# Altium PCB CurrentTrans-board-multi.PcbDoc
Units mm, origin at the board's own origin, x right, y up, seen from the top; angles counter-clockwise.
Board outline 131.62 x 199.02 mm, 2 copper layers (Top Layer, Bottom Layer); 11 components, 11 nets, 65 pads, 5 vias.
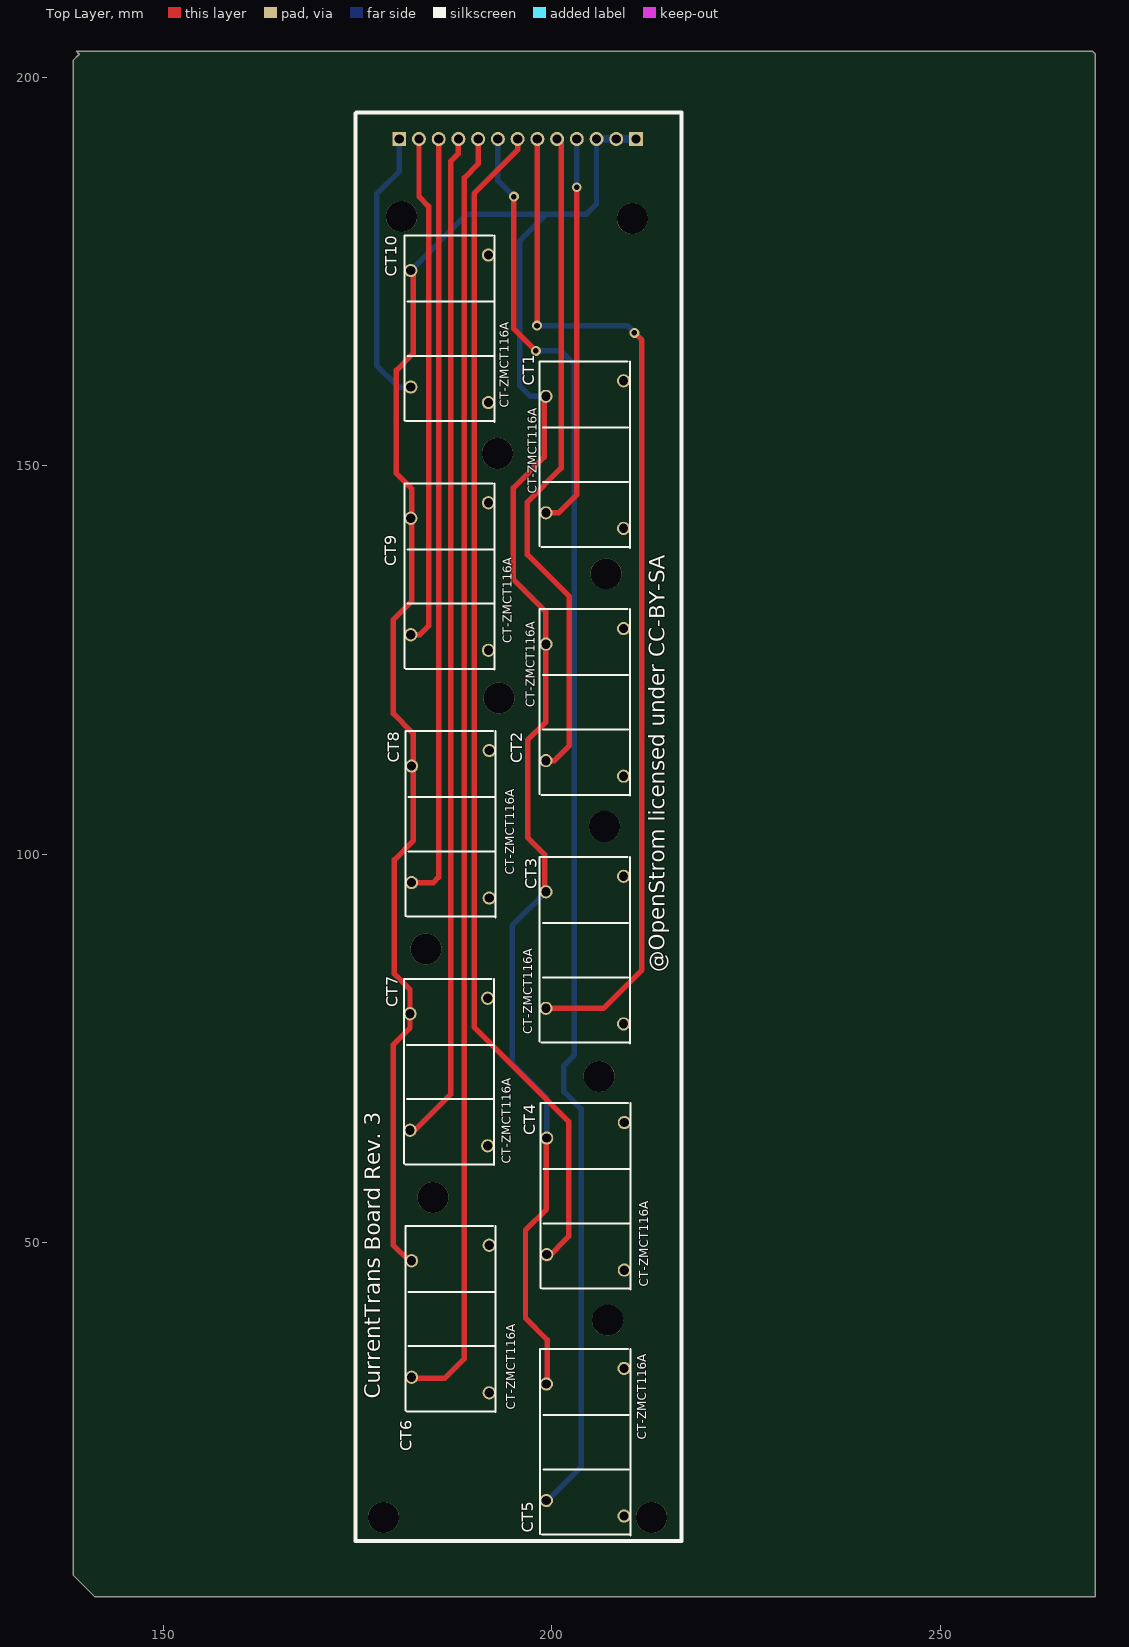
[diagram p0: Top Layer view]
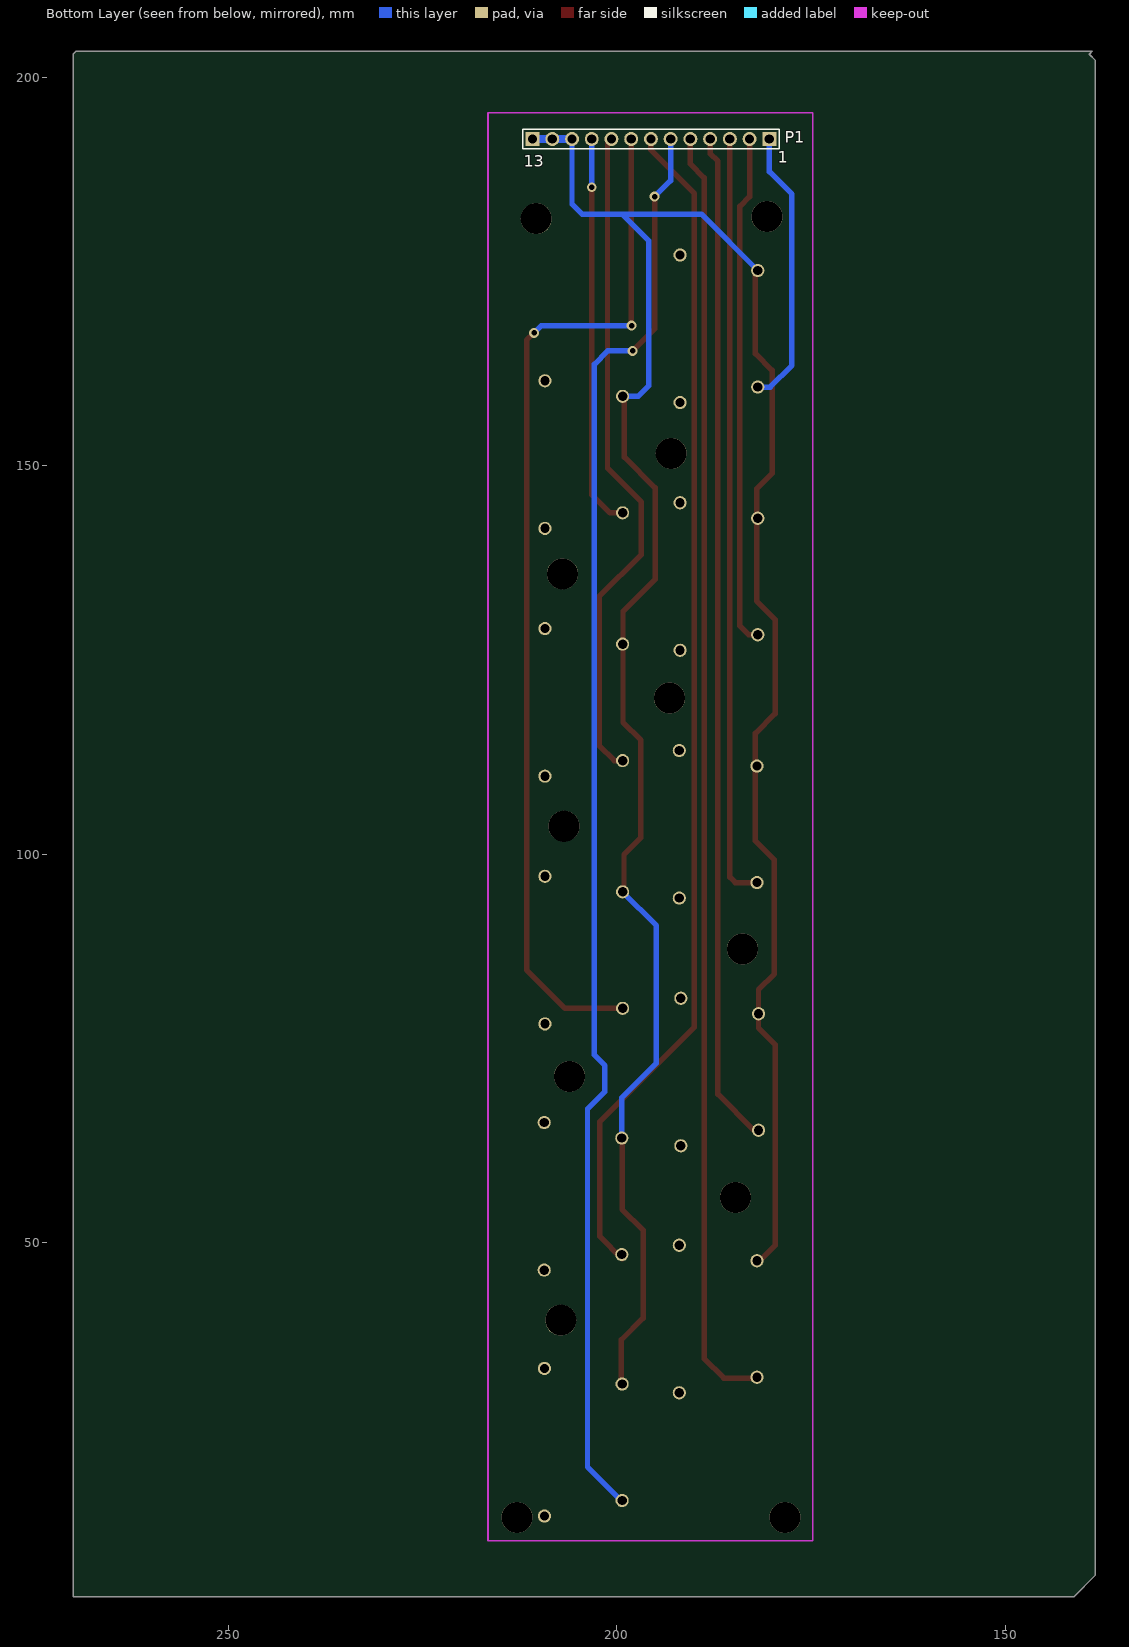
[diagram p1: Bottom Layer view, seen from below]

## Layer stack, top to bottom
Top Layer: signal copper 0.0356
Dielectric: dielectric 0.32, FR-4, Dk 4.8
Bottom Layer: signal copper 0.0356

## Board outline
138.775,203.4 269.6,203.4 270,203 270,4.375 141.175,4.375 138.375,7.175 138.375,202.2 139.175,203

## Design rules (kind name [scope] priority, off if disabled: settings)
Clearance [All] p1: gap=0.254
PolygonConnect [All] p1: connectstyle=Relief reliefconductorwidth=0.254 reliefentries=4 polygonreliefangle="90 Angle" airgapwidth=0.254
RoutingVias [All] p1: holewidth=0.711 width=5 viastyle="Through Hole" minholewidth=0.711 minwidth=1.27 maxholewidth=5 maxwidth=1.27
SilkToSilkClearance [All] p1 off: silktosilkclearance=0.254
SilkToSolderMaskClearance [IsPad] p1 off: minsilkscreentomaskgap=0.254 clearancetoexposedcopper=TRUE
SolderMaskExpansion [All] p1: expansion=0.102
Width [All] p1: maxlimit=2 minlimit=0.254 preferedwidth=0.7
26 further rules are at their usual default settings.

## Components (designator, comment, footprint, x,y, rotation, side; value= is the part's Value field where it differs from the comment)
CT1 "CurrentTransf" CT-ZMCT124 199.25,143.95 r90 top
CT2 "CurrentTransf" CT-ZMCT124 199.25,112.05 r90 top
CT3 "CurrentTransf" CT-ZMCT124 199.25,80.15 r90 top
CT4 "CurrentTransf" CT-ZMCT124 199.35,48.45 r90 top
CT5 "CurrentTransf" CT-ZMCT124 199.312,16.782 r90 top
CT6 "CurrentTransf" CT-ZMCT124 181.95,32.65 r90 top
CT7 "CurrentTransf" CT-ZMCT124 181.75,64.45 r90 top
CT8 "CurrentTransf" CT-ZMCT124 181.95,96.35 r90 top
CT9 "CurrentTransf" CT-ZMCT124 181.85,128.25 r90 top
CT10 "CurrentTransf" CT-ZMCT124 181.85,160.15 r90 top
P1 "Header 13" HDR1X13 210.845,192.086 r180 bottom

## Footprints (in the part's own frame and the unit in brackets; to place one, negate y for a bottom-side part, rotate by r counter-clockwise, add the part's x,y. Pads: shape width x height; smd on the part's side, far side on the other; paste and mask are expansions set on the pad)
CT-ZMCT124 [mm] "current transformer"
  round 1.7 hole 1.2: 1(0,0) 2(15,0) 3(-2,-10) 4(17,-10)
  silkscreen extent -4.5,-10.8 19.5,0.8, body extent -4.63,-10.93 19.63,0.93, height 21
HDR1X13 [mm] "Connector; Header; 13 Position"
  rect 1.8x1.8 hole 1.2: 1(0,0) 13(30.48,0)
  round 1.8 hole 1.2: 2(2.54,0) 3(5.08,0) 4(7.62,0) 5(10.16,0) 6(12.7,0) 7(15.24,0) 8(17.78,0) 9(20.32,0) 10(22.86,0) 11(25.4,0) 12(27.94,0)
  silkscreen extent -1.27,-1.27 31.75,1.27

## Part data
P1: "Header, 13-Pin"

## Free pads (board coordinates)
  round 4 hole 4: 0(178.35,14.6) 0(180.65,182.1) 0(183.8,87.8) 0(184.7,55.8) 0(193,151.6) 0(193.2,120.1) 0(206.1,71.4) 0(206.8,103.6) 0(207,136.1) 0(207.211,39.998) 0(210.375,181.825) 0(212.85,14.6)

## Via types
v1: diameter 1.27, hole 0.711, Top Layer to Bottom Layer, 5 vias

## Nets (pads, with @x,y where several pads share a name; then routed paths per layer and width w, separated by ;. In a path a pad name is that pad's centre, name@x,y a point inside that pad or via, vN(x,y) a via of type N, cw(c..) or ccw(c..) an arc to the next point about the centre after c; other vN are vias at no path point)
NetCT1_1: CT1.1 P1.4 | length 50.7
  Top Layer w0.7: CT1.1 200.875,143.95 203.225,146.3 v1(203.225,185.877)
  Bottom Layer w0.7: v1(203.225,185.877) P1.4
NetCT1_2: CT1.2 CT2.2 CT3.2 CT4.2 CT5.2 CT6.2 CT7.2 CT8.2 CT9.2 CT10.2 P1.1 P1.2 P1.3 | length 341.7
  Top Layer w0.7: CT10.2 182.15,174.85 182.15,164.446 180,162.296 180,149.041 182,147.041 182,132.597 179.6,130.197 179.6,118.095 182.15,115.545 182.15,101.708 179.725,99.283 179.725,84.6 181.75,82.575 CT7.2 181.75,77.65 179.6,75.5 179.6,49.646 181.721,47.525 CT6.2@181.95,47.525 ; CT3.2@199.075,95.3 199.075,99.949 196.9,102.124 196.9,114.68 199.2,116.98 199.2,131.267 195.069,135.398 195.069,147.169 199.025,151.125 199.025,158.725 CT1.2 ; CT4.2@199.3,62.9 199.3,54.28 196.619,51.599 196.619,40.261 199.4,37.48 CT5.2@199.4,31.725
  Bottom Layer w0.7: CT10.2 189.1,182.4 199.3,182.4 ; CT6.2@181.95,47.525 CT6.2@182.25,47.525 ; CT3.2 194.9,90.8 194.9,73.1 199.35,68.65 CT4.2 ; CT1.2 197.25,158.95 195.875,160.325 195.875,178.975 199.3,182.4 ; P1.3 205.765,183.7 204.465,182.4 199.3,182.4
  Bottom Layer w1: P1.3 P1.2 P1.1
NetCT2_1: CT2.1 P1.5 | length 86.2
  Top Layer w0.7: CT2.1 200.325,112.05 202.275,114 202.275,133.15 196.848,138.577 196.848,145.348 201.2,149.7 201.2,191.571 P1.5
NetCT3_1: CT3.1 P1.6 | length 133.8
  Top Layer w0.7: v1(198.1,168.05) 198.145,168.095 P1.6 ; CT3.1 206.65,80.15 211.6,85.1 211.6,166.175 v1(210.65,167.125)
  Bottom Layer w0.7: v1(198.1,168.05) 209.725,168.05 v1(210.65,167.125)
NetCT4_1: CT4.1 P1.7 | length 152.7
  Top Layer w0.7: P1.7 195.605,190.677 190,185.072 190,77.741 202.182,65.559 202.182,50.782 CT4.1@199.3,47.9
NetCT5_1: CT5.1 P1.8 | length 184.6
  Top Layer w0.7: v1(195.125,184.675) 195.125,167.629 v1(197.954,164.8)
  Bottom Layer w0.7: P1.8 193.065,186.735 v1(195.125,184.675) ; v1(197.954,164.8) 201.175,164.8 202.9,163.075 202.9,74.15 201.547,72.797 201.547,69.437 203.775,67.209 203.775,21.1 CT5.1@199.4,16.725
NetCT6_1: CT6.1 P1.9 | length 165.6
  Top Layer w0.7: CT6.1@181.95,32.525 186.225,32.525 188.75,35.05 188.75,187.094 190.525,188.869 P1.9
NetCT7_1: CT7.1 P1.10 | length 130.6
  Top Layer w0.7: CT7.1 182.35,64.45 187,69.1 187,189.23 187.985,190.215 P1.10
NetCT8_1: CT8.1 P1.11 | length 98.8
  Top Layer w0.7: CT8.1 184.745,96.35 185.445,97.05 P1.11
NetCT9_1: CT9.1 P1.12 | length 66
  Top Layer w0.7: CT9.1 183,128.25 184.15,129.4 184.15,183.413 182.905,184.658 P1.12
NetCT10_1: CT10.1 P1.13 | length 35.9
  Bottom Layer w0.7: P1.13 180.365,187.89 177.45,184.975 177.45,162.95 180.25,160.15 CT10.1
pads on no net: CT1.3 CT1.4 CT2.3 CT2.4 CT3.3 CT3.4 CT4.3 CT4.4 CT5.3 CT5.4 CT6.3 CT6.4 CT7.3 CT7.4 CT8.3 CT8.4 CT9.3 CT9.4 CT10.3 CT10.4

## Keep-outs
Keep-Out Layer:
  lines w0.2: 216.584,11.626 174.75,11.626 174.75,195.446 176.196,195.446 186.336,195.446 206.273,195.446 216.584,195.446 216.584,11.677

## Silkscreen, mask and mechanical layers (free items; w line width, h text height)
Top Overlay:
  lines w0.2: 174.75,195.4 174.875,195.525
  lines w0.508: 174.75,195.4 174.75,11.55 216.7,11.55 216.7,195.525 174.875,195.525
  text "@OpenStrom licensed under CC-BY-SA" at 214.548,84.825 h2 r90
  text "CurrentTrans Board Rev. 3" at 177.9,29.9 h2 r90
Bottom Overlay:
  text "1" at 179.3,189 h1.52
  text "13" at 212,188.5 h1.52
Top Solder:
  lines w0.2: 156.198,15.65 156.273,15.575

## Text inside footprints (layer, text, board x,y; h text height)
CT1: Top Overlay "CT-ZMCT116A" at 198.038,146.398 h1.12 r90
CT2: Top Overlay "CT-ZMCT116A" at 197.8,118.9 h1.12 r90
CT3: Top Overlay "CT-ZMCT116A" at 197.5,76.8 h1.12 r90
CT4: Top Overlay "CT-ZMCT116A" at 212.4,44.3 h1.12 r90
CT5: Top Overlay "CT-ZMCT116A" at 212.137,24.632 h1.12 r90
CT6: Top Overlay "CT-ZMCT116A" at 195.3,28.5 h1.12 r90
CT7: Top Overlay "CT-ZMCT116A" at 194.721,60.151 h1.12 r90
CT8: Top Overlay "CT-ZMCT116A" at 195.2,97.375 h1.12 r90
CT9: Top Overlay "CT-ZMCT116A" at 194.85,127.15 h1.12 r90
CT10: Top Overlay "CT-ZMCT116A" at 194.44,157.459 h1.12 r90